# EAGLE board micromouse (EAGLE 9.0.1)
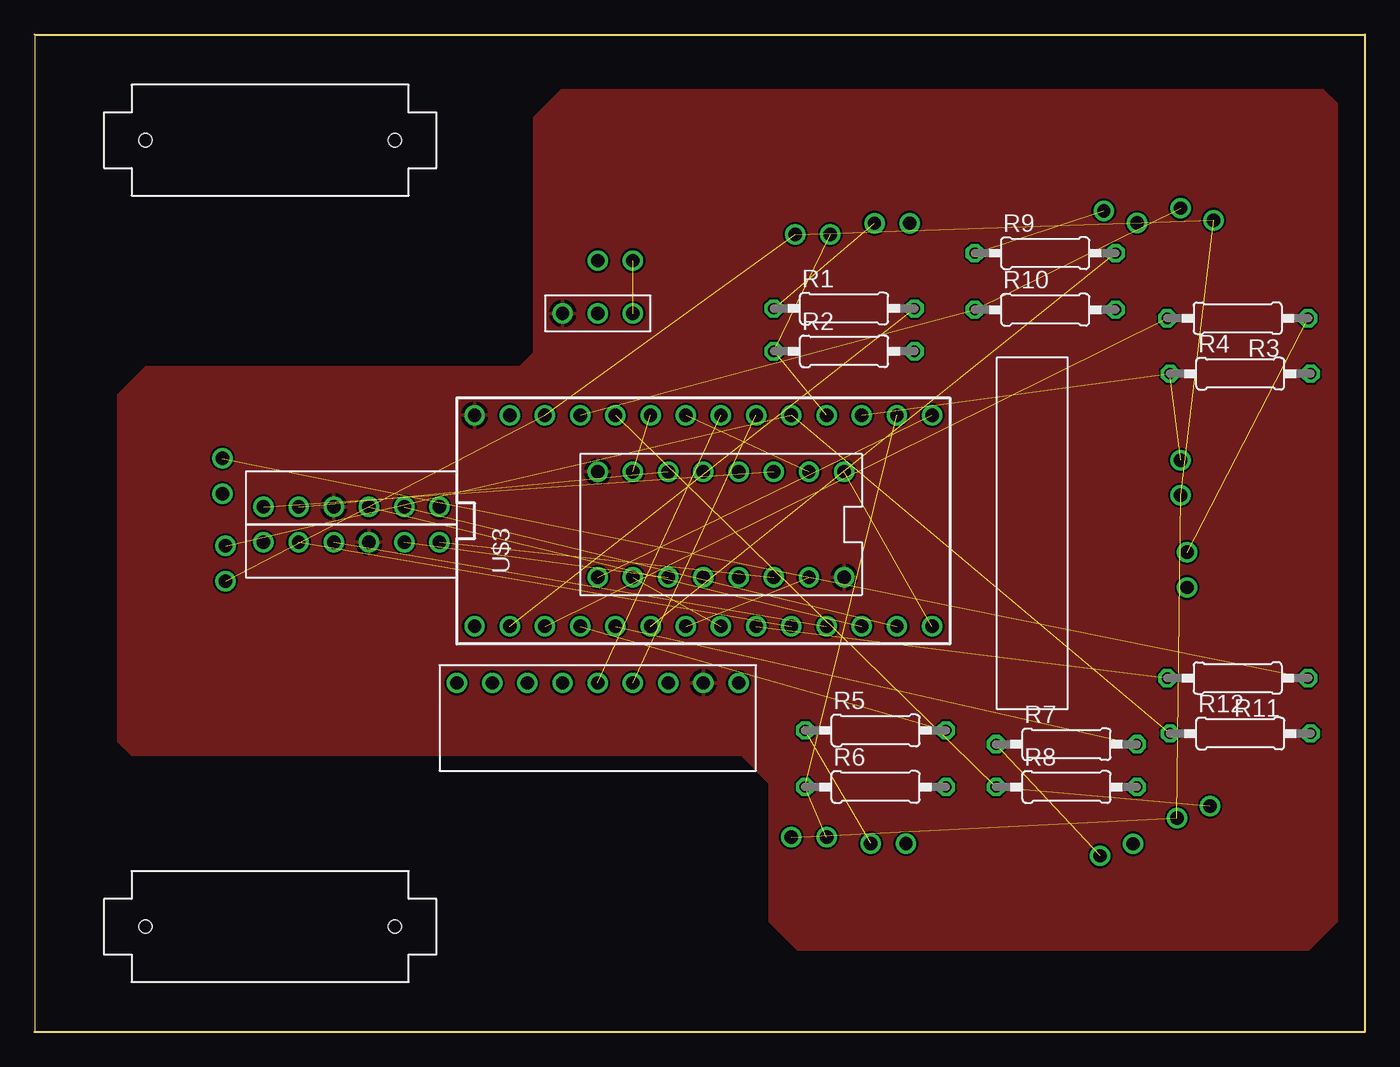
[diagram p0: board, top side]
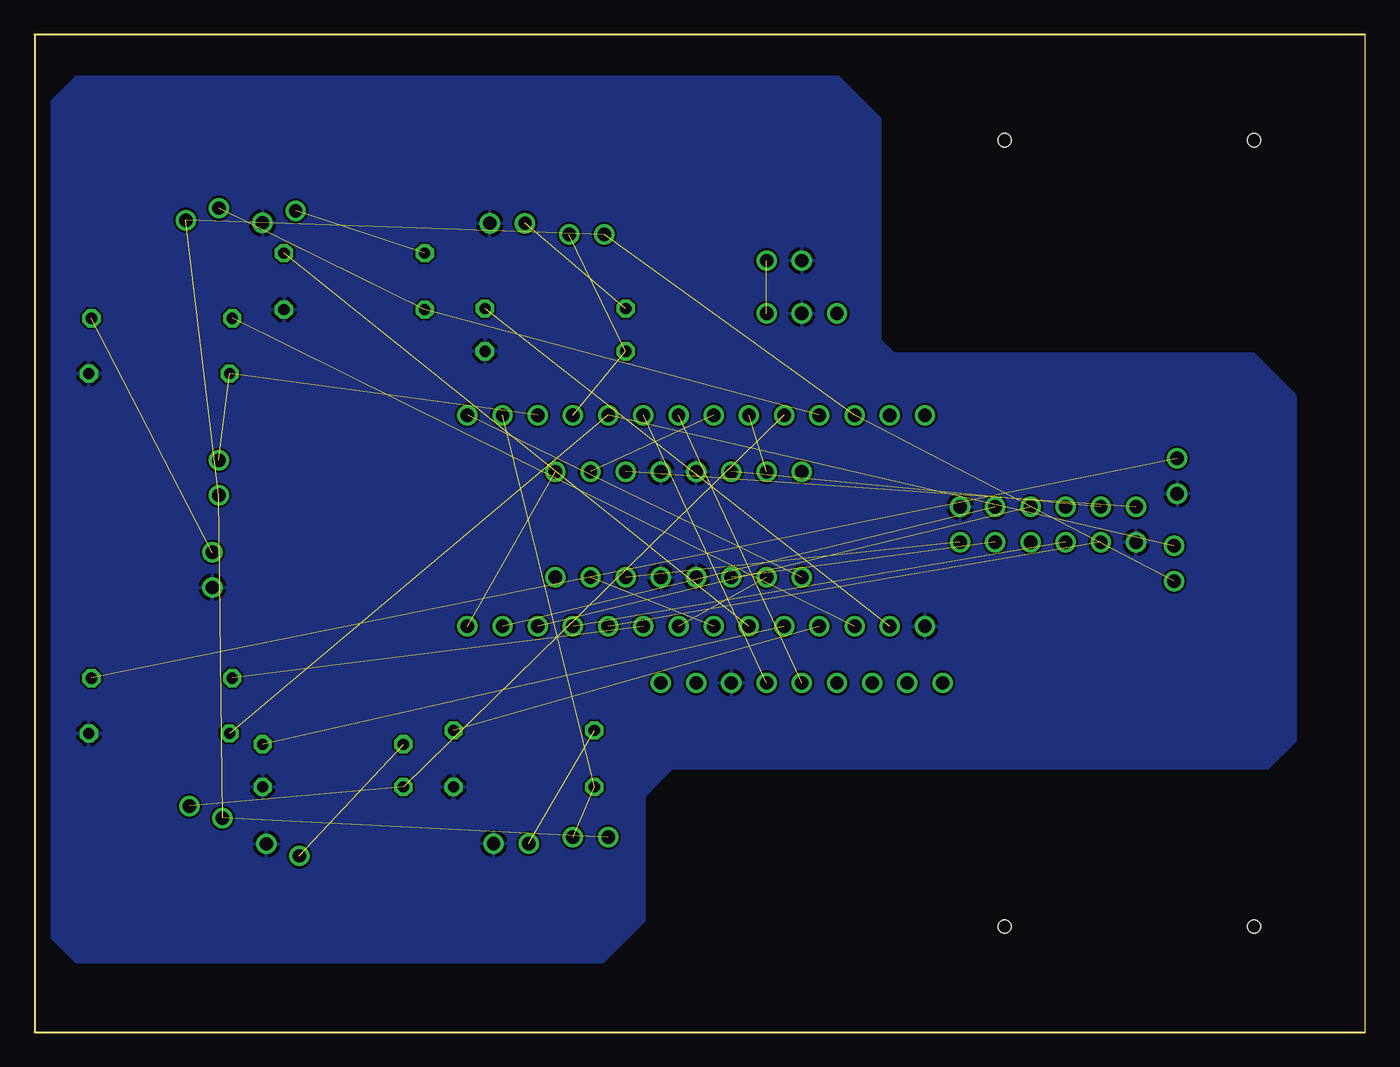
[diagram p1: board, bottom side, seen from below]

Size 96 x 72 mm. Coordinates in mm from the lower left corner, seen from the top.
Outline: 0,72 0,0 96,0 96,72 0,72
Copper layers (1*16): Top 0.035mm / dielectric 1.5mm / Bottom 0.035mm
Design rules "default": minimum track width 6mil, minimum drill 0.35mm, track to track 6mil, track to pad 6mil, pad to pad 6mil, via to via 6mil, smd to smd 6mil, copper to edge 40mil, drill to drill 6mil, minimum pad ring 10mil, minimum via ring 8mil, stop-mask expansion 4mil, vias tented up to drill 0mil, thermal gap 10mil

## Footprints (pad centres in the part's own frame; a part is rotated, then mirrored left to right if it is on the bottom)
0207/10 = drill 0.813 octagon: 1 -5.08,0; 2 5.08,0
MOTOR_ENCODER = drill 0.965: GND -1.27,3.81; M1 -1.27,-8.89; M2 -1.27,-6.35; OUTA -1.27,-1.27; OUTB -1.27,1.27; VCC -1.27,-3.81
TEENSY_3.0-3.2&LC_DIL = drill 0.965: 0 -7.62,13.97; 1 -7.62,11.43; 2 -7.62,8.89; 3 -7.62,6.35; 3.3V 7.62,11.43; 4 -7.62,3.81; 5 -7.62,1.27; 6 -7.62,-1.27; 7 -7.62,-3.81; 8 -7.62,-6.35; 9 -7.62,-8.89; 10 -7.62,-11.43; 11 -7.62,-13.97; 12 -7.62,-16.51; 13 7.62,-16.51; 14/A0 7.62,-13.97; 15/A1 7.62,-11.43; 16/A2 7.62,-8.89; 17/A3 7.62,-6.35; 18/A4 7.62,-3.81; 19/A5 7.62,-1.27; 20/A6 7.62,1.27; 21/A7 7.62,3.81; 22/A8 7.62,6.35; 23/A9 7.62,8.89; AGND 7.62,13.97; GND -7.62,16.51; VIN 7.62,16.51
MOTOR_DRIVER = drill 0.965: L_5V -3.81,-11.43; L_GND_1 -3.81,-1.27; L_GND_2 -3.81,-3.81; L_M1_1 -3.81,1.27; L_M1_2 -3.81,-6.35; M1_ENABLE -3.81,6.35; M1_FWD_PWN -3.81,3.81; M1_REV_PWN -3.81,-8.89; M2_ENABLE 3.81,-11.43; M2_FWD_PWN 3.81,-8.89; M2_REV_PWM 3.81,3.81; R_5V 3.81,6.35; R_GND_1 3.81,-1.27; R_GND_2 3.81,-3.81; R_M2_1 3.81,1.27; R_M2_2 3.81,-6.35
IR_RECIEVER = drill 0.965: REC_ANO -1.27,0; REC_CAT 1.27,0
IR_EMITTER = drill 0.965: EMI_ANO -1.27,0; EMI_CAT 1.27,0
VOLTAGE_REGULATOR = drill 0.965: GND 0,0; VIN 2.54,0; VOUT -2.54,0
BATTERY_INPUT = drill 0.965: BAT_7.4V -1.27,0; BAT_GND 1.27,0
IMU = drill 0.965: GND -1.27,0; NO_USE_1 -1.27,5.08; NO_USE_2 -1.27,-7.62; NO_USE_3 -1.27,-10.16; NO_USE_4 -1.27,-12.7; NO_USE_5 -1.27,-15.24; SCL -1.27,-5.08; SDA -1.27,-2.54; VIN -1.27,2.54
MOTOR_BRACKET = hole 0.965: -9,0; 9,0

## Placement (x,y rotation side)
R1  330  [0207/10]  58.42,52.23 0 top
R2  10K  [0207/10]  58.42,49.15 0 top
R3  330  [0207/10]  86.82,51.53 180 top
R4  10K  [0207/10]  87.01,47.53 0 top
R5  330  [0207/10]  60.69,21.78 0 top
R6  10k  [0207/10]  60.69,17.7 0 top
R7  330  [0207/10]  74.47,20.78 0 top
R8  10K  [0207/10]  74.47,17.7 0 top
R9  330  [0207/10]  72.93,56.23 0 top
R10  10K  [0207/10]  72.93,52.15 0 top
R11  330  [0207/10]  86.82,25.56 180 top
R12  10K  [0207/10]  87.01,21.56 0 top
U$1  MOTOR_ENCODER  [MOTOR_ENCODER]  25.4,36.64 270 top
U$2  MOTOR_ENCODER  [MOTOR_ENCODER]  20.32,36.64 90 top
U$3  TEENSY_3.1-3.2_DIL  [TEENSY_3.0-3.2&LC_DIL]  48.26,36.91 90 top
U$4  MOTOR_DRIVER  [MOTOR_DRIVER]  52.07,36.64 270 top
U$5  IR_RECIEVER  [IR_RECIEVER]  56.15,57.58 0 top
U$6  IR_EMITTER  [IR_EMITTER]  83.17,33.37 270 top
U$7  IR_EMITTER  [IR_EMITTER]  61.61,13.62 0 top
U$8  IR_RECIEVER  [IR_RECIEVER]  55.88,14.08 0 top
U$9  IR_EMITTER  [IR_EMITTER]  61.88,58.39 0 top
U$10  VOLTAGE_REGULATOR  [VOLTAGE_REGULATOR]  40.64,51.88 0 top
U$11  BATTERY_INPUT  [BATTERY_INPUT]  41.91,55.69 180 top
U$12  IR_RECIEVER  [IR_RECIEVER]  82.71,40.02 90 top
U$13  IMU  [IMU]  45.72,23.94 270 top
U$14  IR_EMITTER  [IR_EMITTER]  78.09,13.16 20 top
U$15  IR_RECIEVER  [IR_RECIEVER]  83.63,15.89 20 top
U$16  IR_EMITTER  [IR_EMITTER]  78.36,58.85 340 top
U$17  IR_RECIEVER  [IR_RECIEVER]  83.9,59.04 160 top
U$18  MOTOR_BRACKET  [MOTOR_BRACKET]  17,7.62 0 top
U$19  MOTOR_BRACKET  [MOTOR_BRACKET]  17,64.38 0 top
U$20  BALL_CASTER  [BALL_CASTER]  72,36 270 top
U$22  IR_EMITTER  [IR_EMITTER]  13.55,40.14 270 top
U$23  IR_RECIEVER  [IR_RECIEVER]  13.78,33.83 90 top

## Library data of the parts
R1-R12 = rcl; SPICEPREFIX: R
U$1 U$2 = MOTOR_ENCODER
U$3 = Teensy_3_and_LC_Series_Boards_v1.4
U$4 = motor_driver
U$5 U$8 U$12 U$15 U$17 U$23 = IR_RECIEVER
U$6 U$7 U$9 U$14 U$16 U$22 = IR_EMITTER
U$10 = VOLTAGE_REGULATOR
U$11 = Battery_input
U$13 = IMU
U$18 U$19 = MOTOR_BRACKET
U$20 = BALL_CASTER

## Nets
3.3V_VCC: U$3.3.3V U$5.REC_ANO U$8.REC_ANO U$12.REC_ANO U$15.REC_ANO U$17.REC_ANO U$23.REC_ANO
5V_VCC: U$1.VCC U$2.VCC U$3.VIN U$4.L_5V U$4.R_5V U$10.VOUT U$13.VIN
AGND: U$3.AGND
GND: R2.2 R4.2 R6.2 R8.2 R10.2 R12.2 U$1.GND U$2.GND U$3.GND U$4.L_GND_1 U$4.L_GND_2 U$4.R_GND_1 U$4.R_GND_2 U$6.EMI_CAT U$7.EMI_CAT U$9.EMI_CAT U$10.GND U$11.BAT_GND U$13.GND U$14.EMI_CAT U$16.EMI_CAT U$22.EMI_CAT
M1_FWD_PWM: U$3.20/A6 U$4.M1_FWD_PWN
M1_L: U$1.M1 U$4.L_M1_1
M1_R: U$2.M1 U$4.R_M2_1
M1_REV_PWM: U$3.21/A7 U$4.M1_REV_PWN
M2_ENABLE: U$3.13 U$4.M2_ENABLE
M2_FWD_PWM: U$3.6 U$4.M2_FWD_PWN
M2_L: U$1.M2 U$4.L_M1_2
M2_R: U$2.M2 U$4.R_M2_2
N$1: U$10.VIN U$11.BAT_7.4V
N$2: U$3.19/A5 U$13.SCL
N$3: U$3.18/A4 U$13.SDA
N$4: U$3.12 U$4.M1_ENABLE
N$5: U$3.5 U$4.M2_REV_PWM
N$6: R7.2 U$3.3
N$7: R7.1 U$14.EMI_ANO
N$8: R8.1 U$3.22/A8 U$15.REC_CAT
N$9: R9.2 U$3.4
N$10: R9.1 U$16.EMI_ANO
N$11: R11.2 U$3.7
N$12: R10.1 U$3.23/A9 U$17.REC_CAT
N$13: R11.1 U$22.EMI_ANO
N$14: R12.1 U$3.17/A3 U$23.REC_CAT
N$19: R1.2 U$3.0
N$20: R1.1 U$9.EMI_ANO
N$21: R6.1 U$3.14/A0 U$8.REC_CAT
N$22: R3.2 U$3.1
N$23: R3.1 U$6.EMI_ANO
N$24: R4.1 U$3.15/A1 U$12.REC_CAT
N$25: R5.2 U$3.2
N$26: R5.1 U$7.EMI_ANO
N$28: R2.1 U$3.16/A2 U$5.REC_CAT
OUTA_L: U$1.OUTA U$3.10
OUTA_R: U$2.OUTA U$3.9
OUTB_L: U$1.OUTB U$3.11
OUTB_R: U$2.OUTB U$3.8

## Tracks (layer width: path | path; a pad name or v marks a point on that pad's centre or on a via)
3.3V_VCC  (6 unrouted)
5V_VCC
  pour Top: 6,46 6,21 7,20 17,20 51,20 53,18 53,8 55,6 56,6 92,6 94,8 94,67 93,68 38,68 36,66 36,49 35,48 8,48
GND
  pour Bottom: 7,48 5,46 5,21 7,19 50,19 51,18 52,17 52,8 55,5 92,5 93,5 95,7 95,67 94,68 93,69 38,69 36,67 35,66 35,50 34,49 8,49
M1_FWD_PWM  (1 unrouted)
M1_L  (1 unrouted)
M1_R  (1 unrouted)
M1_REV_PWM  (1 unrouted)
M2_ENABLE  (1 unrouted)
M2_FWD_PWM  (1 unrouted)
M2_L  (1 unrouted)
M2_R  (1 unrouted)
N$1  (1 unrouted)
N$2  (1 unrouted)
N$3  (1 unrouted)
N$4  (1 unrouted)
N$5  (1 unrouted)
N$6  (1 unrouted)
N$7  (1 unrouted)
N$8  (2 unrouted)
N$9  (1 unrouted)
N$10  (1 unrouted)
N$11  (1 unrouted)
N$12  (2 unrouted)
N$13  (1 unrouted)
N$14  (2 unrouted)
N$19  (1 unrouted)
N$20  (1 unrouted)
N$21  (2 unrouted)
N$22  (1 unrouted)
N$23  (1 unrouted)
N$24  (2 unrouted)
N$25  (1 unrouted)
N$26  (1 unrouted)
N$28  (2 unrouted)
OUTA_L  (1 unrouted)
OUTA_R  (1 unrouted)
OUTB_L  (1 unrouted)
OUTB_R  (1 unrouted)